# Altium PCB Placa_Sencilla_v2.PcbDoc
Units mm, origin at the board's own origin, x right, y up, seen from the top; angles counter-clockwise.
Board outline 48 x 48 mm, 2 copper layers (Top Layer, Bottom Layer), stack 1.571 mm thick; 56 components, 50 nets, 225 pads, 55 vias.
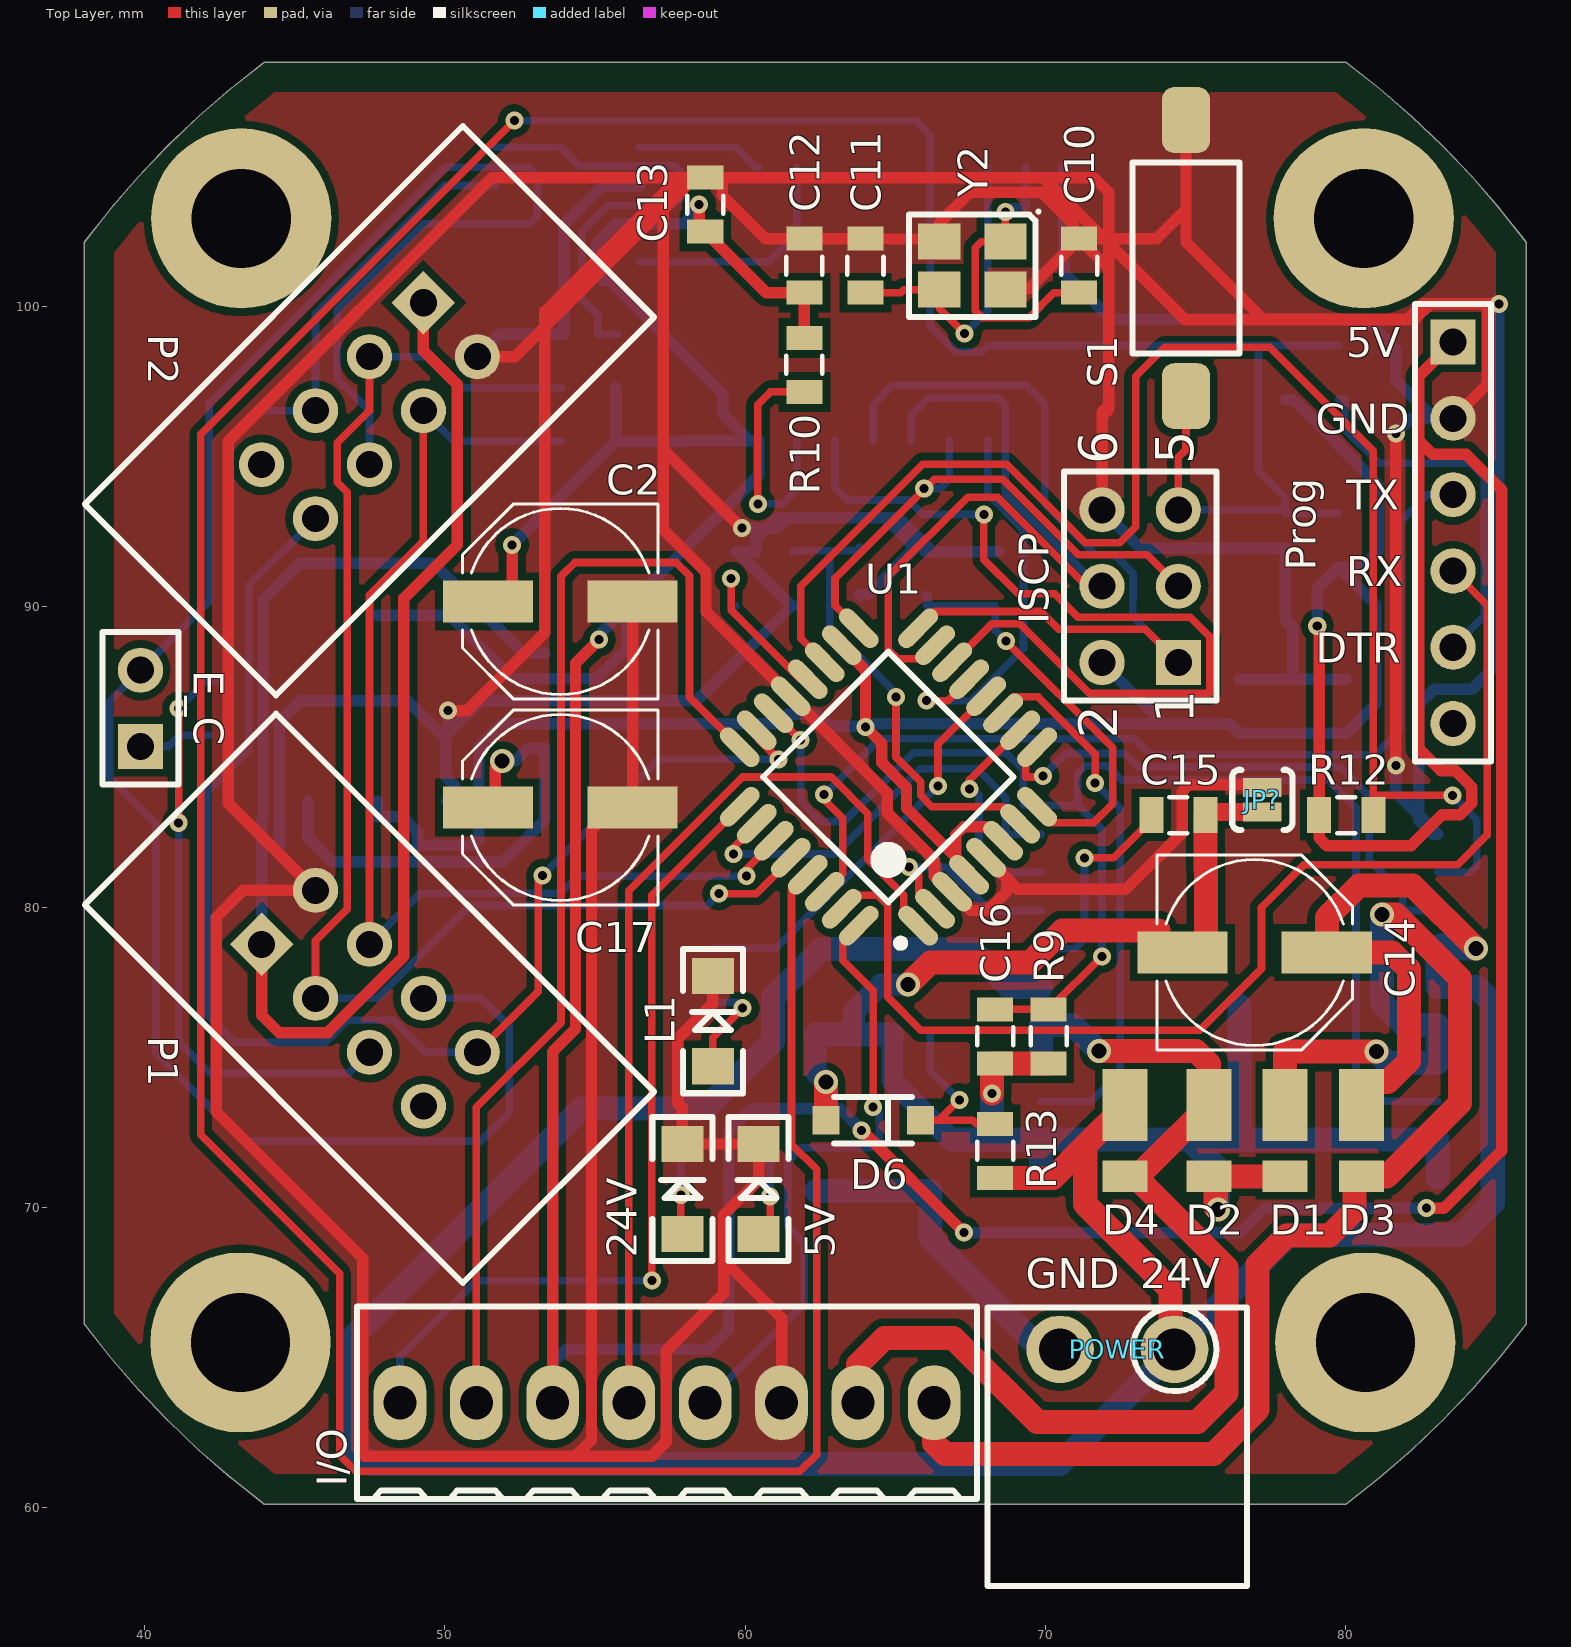
[diagram p0: Top Layer view]
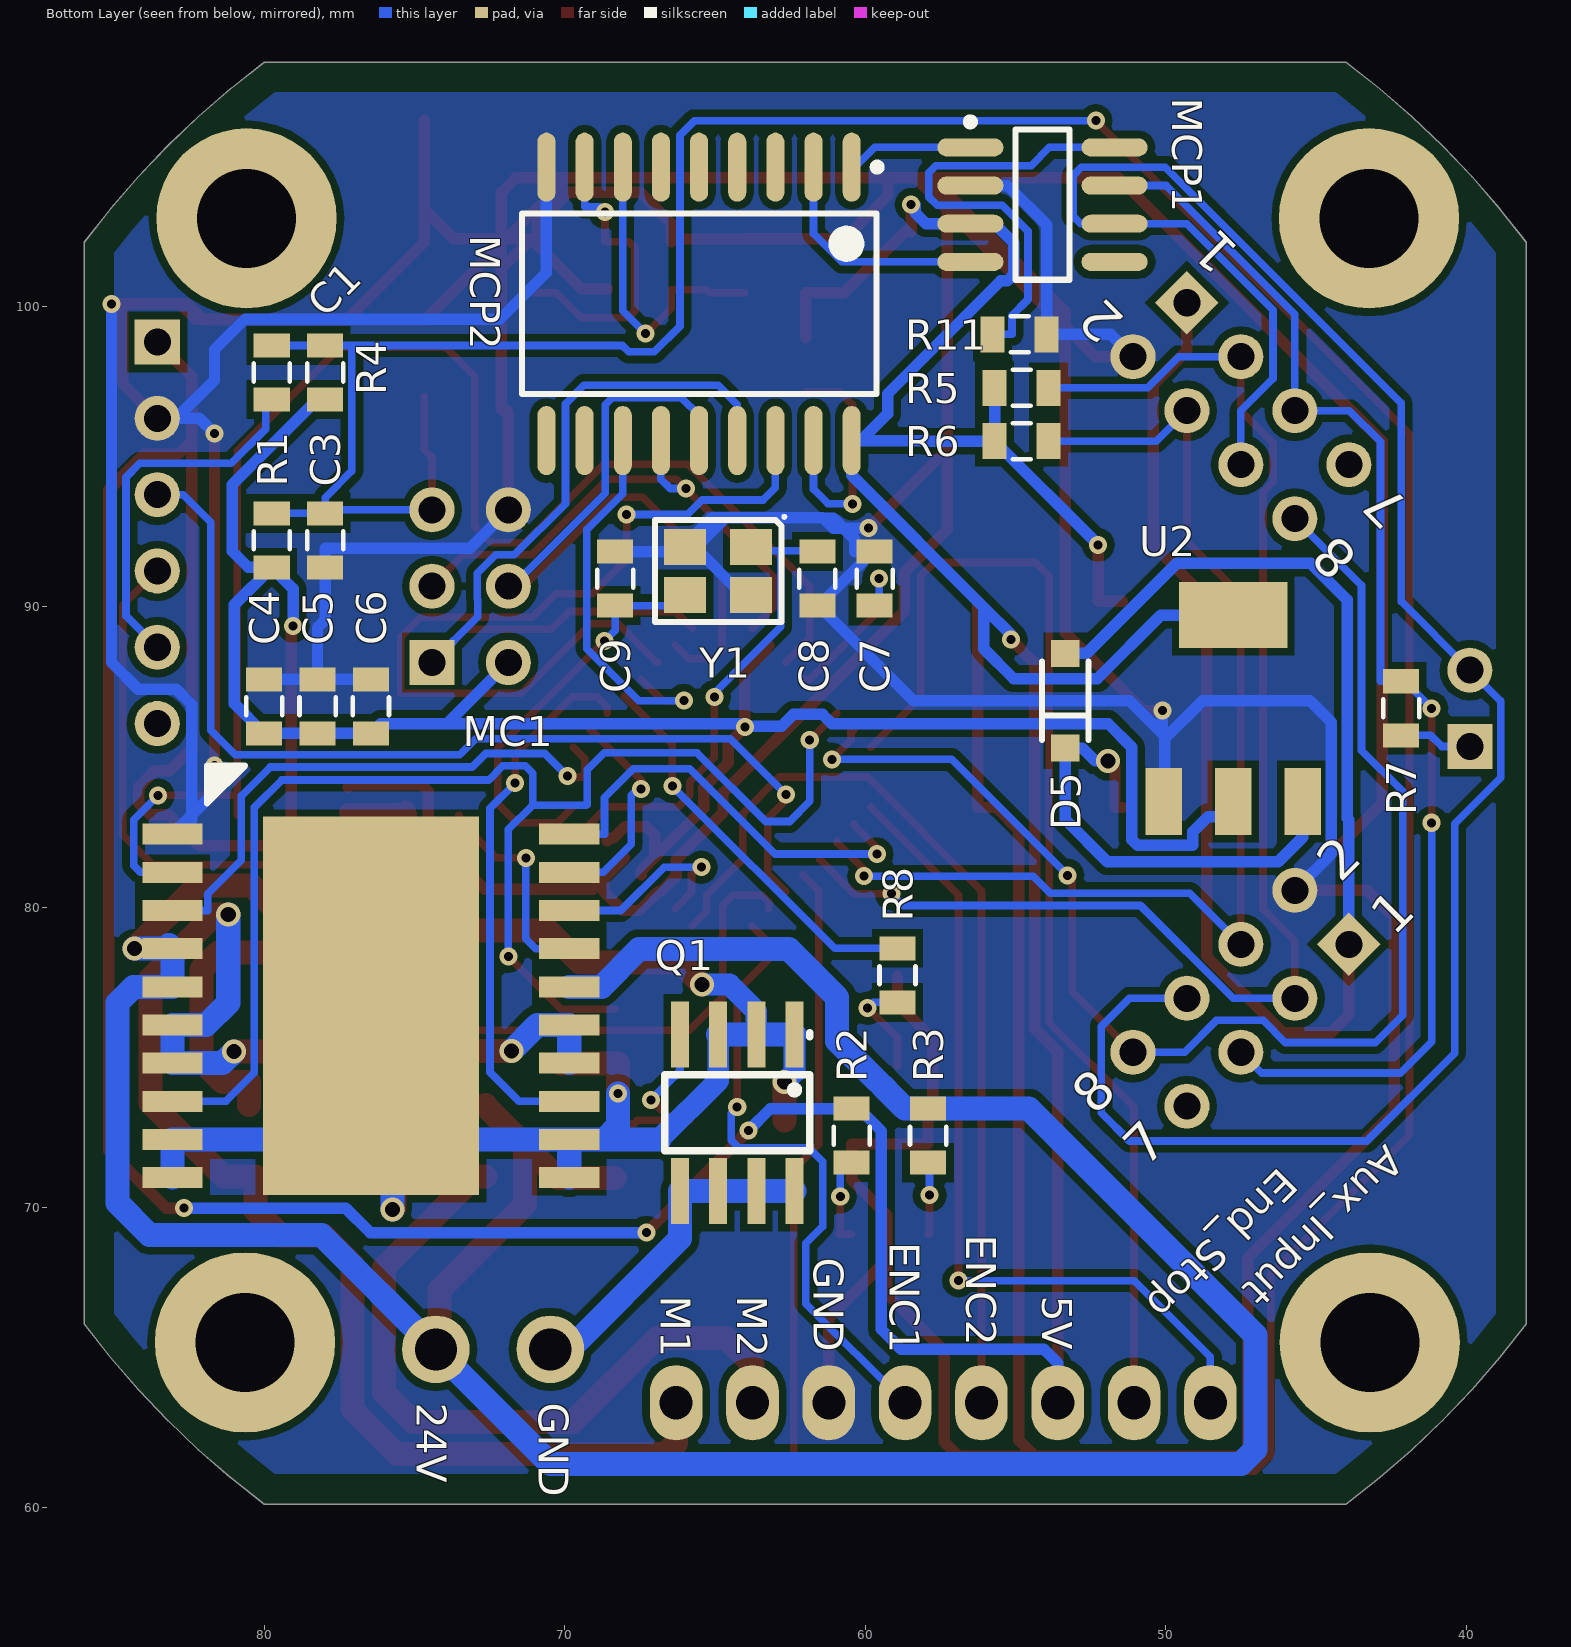
[diagram p1: Bottom Layer view, seen from below]
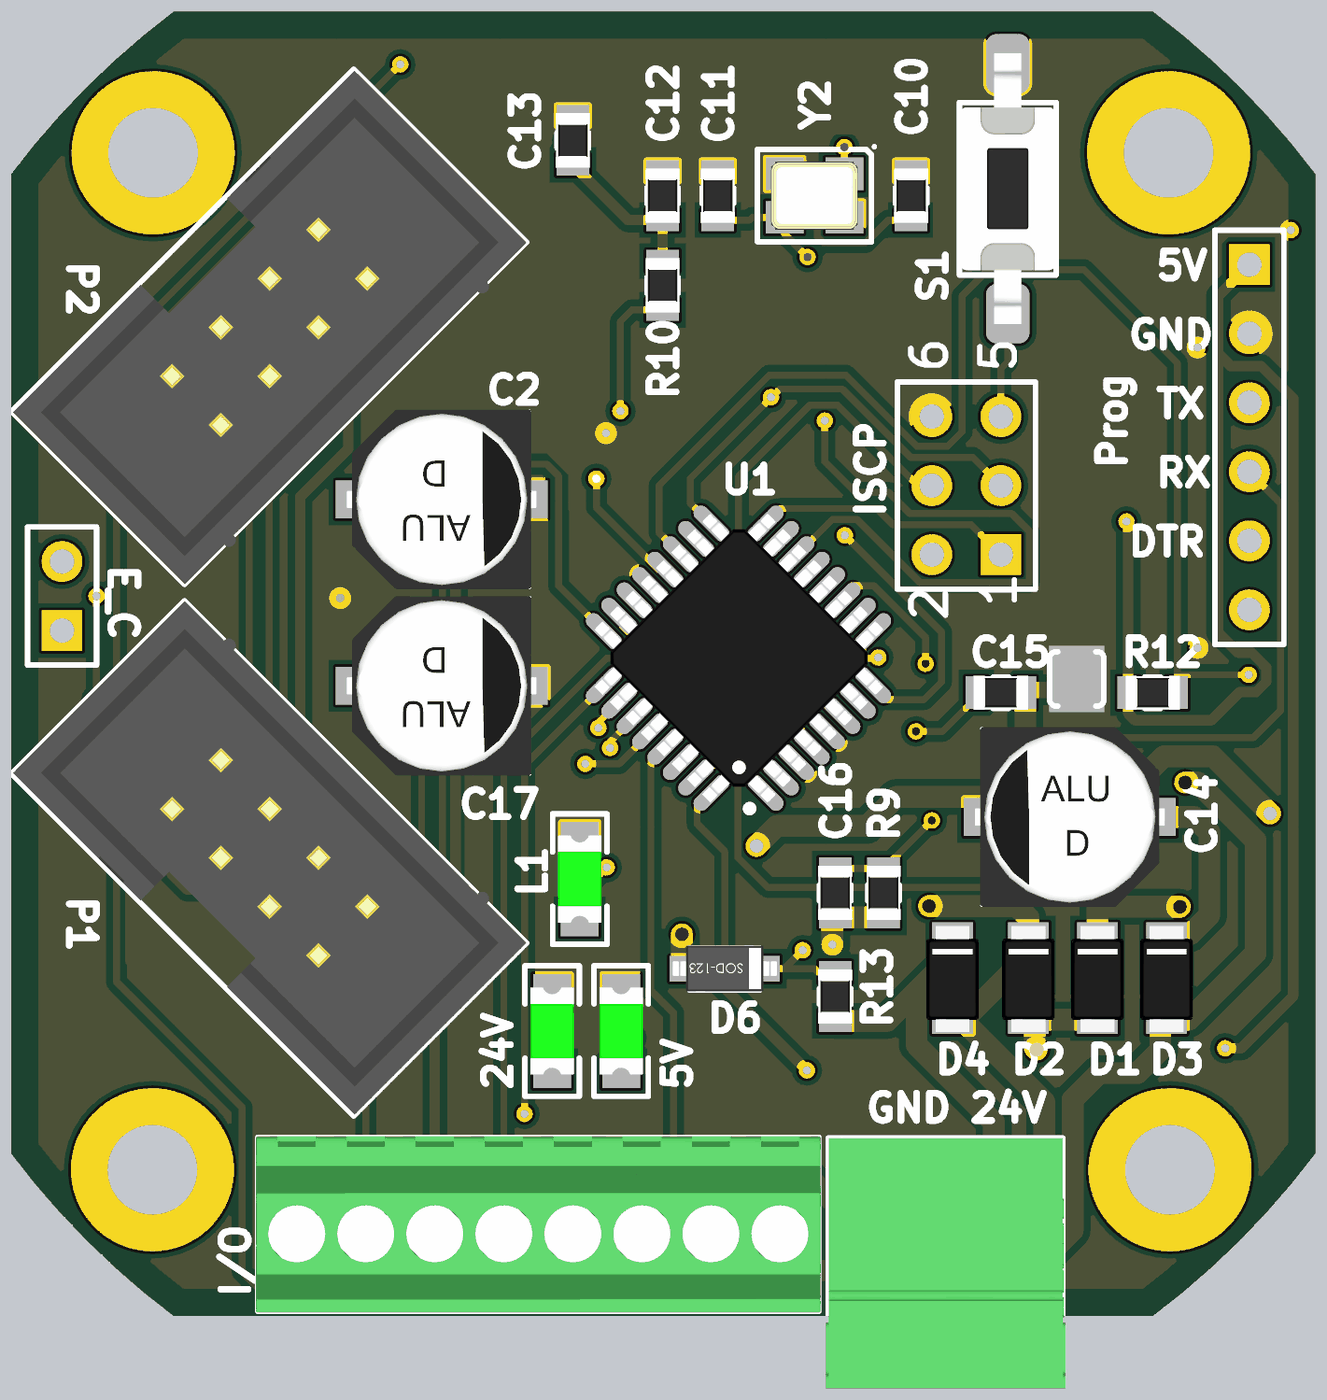
[diagram p2: 3D render of the assembled board from above, using the file's embedded part models]
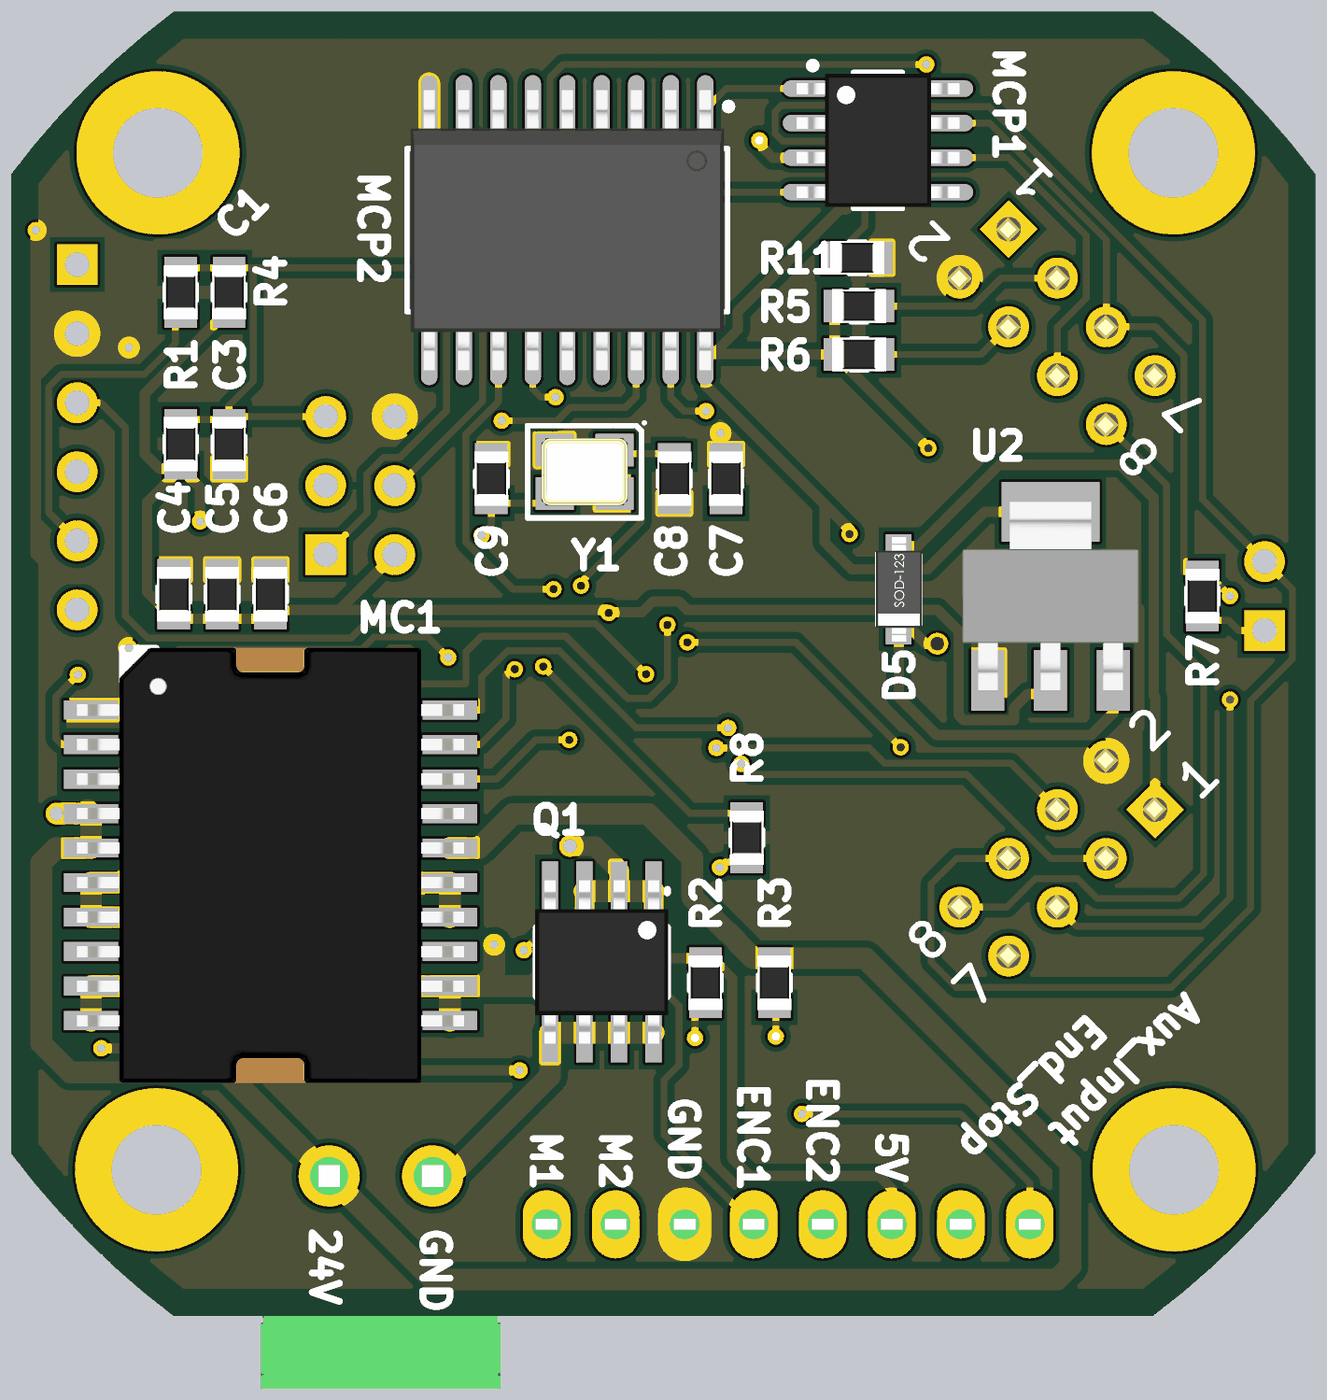
[diagram p3: 3D render of the assembled board from below, using the file's embedded part models]

## Layer stack, top to bottom
Top Solder: solder mask 0.0102, Solder Resist, Dk 3.5
Top Layer: signal copper 0.0356
Dielectric 1: dielectric 1.5, FR-4, Dk 4.8
Bottom Layer: signal copper 0.0356
Bottom Solder: solder mask 0.0102, Solder Resist, Dk 3.5

## Board outline
40.788,62.908 39.809,63.934 38.88,65.004 38.001,66.119 38.001,102.125 38.88,103.239 39.809,104.309 40.788,105.335 41.813,106.313 42.884,107.243 43.998,108.122 80.004,108.122 81.118,107.243 82.189,106.313 83.214,105.335 84.192,104.309 85.122,103.239 86.001,102.125 86.001,66.119 85.122,65.004 84.192,63.934 83.214,62.908 82.189,61.93 81.118,61 80.004,60.122 43.998,60.122 42.884,61 41.813,61.93

## Design rules (kind name [scope] priority, off if disabled: settings)
BoardOutlineClearance [All] p1: gap=1 ignorepadtopadclearanceinfootprint=FALSE
Clearance Clearance_2 [InNamedPolygon('GND TOP PLANE')] p1: gap=0.254 ignorepadtopadclearanceinfootprint=FALSE except(0: Arc-Hole Track-Hole SMDPad-Hole THPad-Hole Via-Hole Fill-Hole Poly-Hole Region-Hole Text-Hole)
Clearance Clearance_1 [InNamedPolygon('GND BOTTOM PLANE')] p2: gap=0.254 ignorepadtopadclearanceinfootprint=FALSE except(0: Arc-Hole Track-Hole SMDPad-Hole THPad-Hole Via-Hole Fill-Hole Poly-Hole Region-Hole Text-Hole)
Clearance Clearance_JUMPER [InNet('GND') vs InNet('PGND')] p3: gap=0.05 ignorepadtopadclearanceinfootprint=FALSE
Clearance Clearance_POWER [InNet('24V') vs InNet('PGND')] p4: gap=0.381 ignorepadtopadclearanceinfootprint=FALSE
Clearance [All] p5: gap=0.152 ignorepadtopadclearanceinfootprint=FALSE
HoleSize [All] p1: absolutevalues=TRUE maxlimit=6.3 minlimit=0.3 maxpercent=80.000 minpercent=20.000
PlaneClearance [All] p1: clearance=5.016
PlaneConnect [All] p1: planeconnectstyle=Relief reliefexpansion=0.508 reliefentries=4 reliefconductorwidth=0.381 reliefairgap=-0.05
PolygonConnect [All] p1: connectstyle=Relief reliefconductorwidth=0.254 reliefentries=4 polygonreliefangle="90 Angle" airgapwidth=-0.05
RoomDefinition Placa_Motor_Esquematico_v2 [InComponentClass('Placa_Motor_Esquematico_v2')] p1: confinementstyle=ConfineOut formatcopy=TRUE lockcomponents=FALSE outline 260.731,135.89 261.112,135.509 261.112,130.048 264.541,130.048 265.176,130.683 265.176,134.874 264.16,135.89 264.287,136.017 264.287,139.446
RoutingVias RoutingVias_24V [InNet('24V')] p1: holewidth=0.5 width=0.8 viastyle="Through Hole" minholewidth=0.3 minwidth=0.6 maxholewidth=1 maxwidth=1.2
RoutingVias RoutingVias_PGND [InNet('PGND')] p2: holewidth=0.5 width=0.8 viastyle="Through Hole" minholewidth=0.3 minwidth=0.6 maxholewidth=1 maxwidth=1.2
RoutingVias RoutingVias_PGNDC [InNet('PGNDC')] p3: holewidth=0.5 width=0.8 viastyle="Through Hole" minholewidth=0.3 minwidth=0.6 maxholewidth=1 maxwidth=1.2
RoutingVias RoutingVias_MOTOR1 [InNet('MOTOR1')] p4: holewidth=0.5 width=0.8 viastyle="Through Hole" minholewidth=0.3 minwidth=0.6 maxholewidth=1 maxwidth=1.2
RoutingVias RoutingVias_MOTOR2 [InNet('MOTOR2')] p5: holewidth=0.5 width=0.8 viastyle="Through Hole" minholewidth=0.3 minwidth=0.6 maxholewidth=1 maxwidth=1.2
RoutingVias RoutingVias_C17_1 [InNet('NetC17_+')] p6: holewidth=0.5 width=0.8 viastyle="Through Hole" minholewidth=0.3 minwidth=0.6 maxholewidth=1 maxwidth=1.2
RoutingVias [All] p7: holewidth=0.3 width=0.6 viastyle="Through Hole" minholewidth=0.3 minwidth=0.6 maxholewidth=1 maxwidth=1.2
SMDNeckDown [All] p1: percent=120.000
SilkToSilkClearance [All] p1 off: silktosilkclearance=0.127
SolderMaskExpansion [All] p1: expansion=0.102
Width Width_Motor1 [InNet('MOTOR1')] p1: maxlimit=0.889 minlimit=0.7 preferedwidth=0.8
Width Width_Motor2 [InNet('MOTOR2')] p2: maxlimit=0.889 minlimit=0.7 preferedwidth=0.8
Width Width_24V [InNet('24V')] p3: maxlimit=0.889 minlimit=0.7 preferedwidth=0.8
Width Width_PGND [InNet('PGND')] p4: maxlimit=0.889 minlimit=0.6 preferedwidth=0.8
Width Width_PGNDC [InNet('PGNDC')] p5: maxlimit=0.889 minlimit=0.6 preferedwidth=0.8
Width Width_GND [InNet('GND')] p6: maxlimit=0.508 minlimit=0.254 preferedwidth=0.381 checkconnectedcopper=TRUE
Width Width_Vin [InNet('Vin')] p7: maxlimit=0.508 minlimit=0.254 preferedwidth=0.381 checkconnectedcopper=TRUE
Width Width_C17_1 [InNet('NetC17_+')] p8: maxlimit=0.508 minlimit=0.254 preferedwidth=0.381 checkconnectedcopper=TRUE
Width Width_5V [InNet('5V')] p9: maxlimit=0.381 minlimit=0.254 preferedwidth=0.381 checkconnectedcopper=TRUE
Width [All] p10: maxlimit=0.508 minlimit=0.254 preferedwidth=0.254
26 further rules are at their usual default settings.

## Components (designator, comment, footprint, x,y, rotation, side; value= is the part's Value field where it differs from the comment)
5V "1206 LED" LED-1206 60.452,70.612 r90 top
24V "1206 LED" LED-1206 57.912,70.612 r90 top
C1 "100n" 0805 79.756,97.79 r270 bottom
C2 "47u" PANASONIC_D 53.848,90.17 r180 top
C3 "22p" 0805 77.978,92.202 r270 bottom
C4 "100n" 0805 80.01,86.679 r90 bottom
C5 "100n" 0805 78.232,86.679 r90 bottom
C6 "100n" 0805 76.454,86.679 r90 bottom
C7 "100n" 0805 59.69,90.932 r90 bottom
C8 "22p" 0805 61.595,90.932 r270 bottom
C9 "22p" 0805 68.326,90.932 r90 bottom
C10 "22p" 0805 71.12,101.346 r90 top
C11 "22p" 0805 64.008,101.346 r90 top
C12 "100n" 0805 61.976,101.346 r90 top
C13 "100n" 0805 58.674,103.378 r90 top
C14 "100u" PANASONIC_D 76.962,78.486 r0 top
C15 "33n" 0805 74.422,83.058 r0 top
C16 "1u" 0805 68.326,75.692 r270 top
C17 "47u" PANASONIC_D 53.848,83.312 r180 top
D1 "SBR3U40P1-7" POWERDI-123 77.978,71.882 r90 top
D2 "SBR3U40P1-7" POWERDI-123 75.438,71.882 r90 top
D3 "SBR3U40P1-7" POWERDI-123 80.518,71.882 r90 top
D4 "SBR3U40P1-7" POWERDI-123 72.644,71.882 r90 top
D5 "SOD123-1A" SOD-123 53.34,86.868 r90 bottom
D6 "13V Zener MM1Z13" SOD-123 64.262,72.898 r180 top
E_C "Header 2" HDR1X2 39.878,85.344 r90 top
I/O "282834-8" "TE 282834-8" 57.404,63.5 r180 top
ISCP "Header 3X2" HDR2X3 74.422,88.138 r90 top
JP? "JUMPER-PAD-2-NC_BY_PASTE" PAD-JUMPER-2-NC_BY_PASTE_YES_SILK 77.216,83.566 r90 top
L1 "1206 LED" LED-1206 58.928,76.2 r90 top
MC1 "MC33887" SOIC127P1420X340-21N 76.454,76.708 r180 bottom
MCP1 "MCP2551T-I/SN" SOIC-SN8_N 54.102,103.378 r180 bottom
MCP2 "MCP2515T-E/SO" SOIC-SO18_N 65.532,100.076 r270 bottom
P1 "IDC2X4" IDC2X4 47.498,76.962 r315 top
P2 "IDC2X4" IDC2X4 47.498,96.52 r225 top
POWER "20020110-D021A01LF" "FCI 06-381-2PIN" 72.39,61.976 r180 top
Prog "Header 6" HDR1X6 83.566,98.806 r270 top
Q1 "IRF7832TRPBF" SO-08 64.262,73.152 r0 bottom
R1 "10K" 0805 79.756,92.202 r270 bottom
R2 "560" 0805 60.452,72.39 r90 bottom
R3 "5.6K" 0805 57.912,72.39 r90 bottom
R4 "10K" 0805 77.978,97.79 r90 bottom
R5 "0" 0805 54.797,97.282 r0 bottom
R6 "0" 0805 54.797,95.504 r0 bottom
R7 "124" 0805 42.164,86.614 r270 bottom
R8 "560" 0805 58.928,77.724 r90 bottom
R9 "200" 0805 70.104,75.692 r90 top
R10 "10K" 0805 61.976,98.044 r90 top
R11 "4.7K" 0805 54.864,99.06 r0 bottom
R12 "47k" 0805 80.01,83.058 r180 top
R13 "20K" 0805 68.326,71.882 r270 top
S1 "FSMSMTR" "TE FSMSMTR" 74.676,101.6 r180 top
U1 "ATmega328P-AU" 32A_N 64.77,84.328 r135 top
U2 "NCP1117" SOT223 47.752,86.614 r180 bottom
Y1 "16MHz" "NDK NX3225SA" 64.897,91.186 r0 bottom
Y2 "16MHz" "NDK NX3225SA" 67.564,101.346 r180 top

## Footprints (in the part's own frame and the unit in brackets; to place one, negate y for a bottom-side part, rotate by r counter-clockwise, add the part's x,y. Pads: shape width x height; smd on the part's side, far side on the other; paste and mask are expansions set on the pad)
32A_N [mm] "Thin QFP, 32-Leads, Body 7x7mm, Pitch 0.8mm, IPC Medium Density"
  oval 1.65x0.55 smd: 1(-4.2,2.8) 2(-4.2,2) 3(-4.2,1.2) 4(-4.2,0.4) 5(-4.2,-0.4) 6(-4.2,-1.2) 7(-4.2,-2) 8(-4.2,-2.8) 17(4.2,-2.8) 18(4.2,-2) 19(4.2,-1.2) 20(4.2,-0.4) 21(4.2,0.4) 22(4.2,1.2) 23(4.2,2) 24(4.2,2.8)
  oval 0.55x1.65 smd: 9(-2.8,-4.2) 10(-2,-4.2) 11(-1.2,-4.2) 12(-0.4,-4.2) 13(0.4,-4.2) 14(1.2,-4.2) 15(2,-4.2) 16(2.8,-4.2) 25(2.8,4.2) 26(2,4.2) 27(1.2,4.2) 28(0.4,4.2) 29(-0.4,4.2) 30(-1.2,4.2) 31(-2,4.2) 32(-2.8,4.2)
  silkscreen extent -4.32,-2.95 2.95,3.75, body extent -4.52,-4.53 4.5,4.5, height 1.15
0805 [mil]
  rect 31.5x47.24 smd: 1(-35.43,0) 2(35.43,0)
  silkscreen extent -12,-24 12,24, body extent -39,-25 39,25, height 20
"FCI 06-381-2PIN" [mm] "FCI Pluggable Terminal Block"
  round 2.25 hole 1.4: 1(-1.905,-3.302) 2(1.905,-3.302)
  silkscreen extent -4.32,-4.7 4.32,4.57, body extent -4.4,-4.7 4.4,4.5, height 7.6
HDR1X2 [mm] "Connector; Header; 2 Position"
  rect 1.5x1.5 hole 0.9: 1(0,0)
  round 1.5 hole 0.9: 2(2.54,0)
  silkscreen extent -1.27,-1.27 3.81,1.27
HDR1X6 [mm] "Connector; Header; 6 Position"
  rect 1.5x1.5 hole 0.9: 1(0,0)
  round 1.5 hole 0.9: 2(2.54,0) 3(5.08,0) 4(7.62,0) 5(10.16,0) 6(12.7,0)
  silkscreen extent -1.27,-1.27 13.97,1.27
HDR2X3 [mm] "Connector; Header; 3x2 Position"
  rect 1.5x1.5 hole 0.9: 1(0,0)
  round 1.5 hole 0.9: 2(0,2.54) 3(2.54,0) 4(2.54,2.54) 5(5.08,0) 6(5.08,2.54)
  silkscreen extent -1.27,-1.27 6.35,3.81
IDC2X4 [mm] "IDC Connector 2x4"
  rect 1.5x1.5 hole 0.9: 1(-3.81,-1.27)
  round 1.5 hole 0.9: 2(-3.81,1.27) 3(-1.27,-1.27) 4(-1.27,1.27) 5(1.27,-1.27) 6(1.27,1.27) 7(3.81,-1.27) 8(3.81,1.27)
  silkscreen extent -8.9,-4.5 8.9,4.5, body extent -8.89,-4.45 8.89,4.76, height 9.01
LED-1206 [mm]
  rect 1.2x1.4 smd: A(-1.5,0) C(1.5,0)
  silkscreen extent -2.4,-1 2.4,1, body extent -1.6,-0.8 1.6,0.8, height 1.11
"NDK NX3225SA" [mm] "Crystal, 4-Leads, Body 2.50x3.20mm, Pitch 2.20mm, IPC Medium Density"
  rect 1.4x1.2 smd: 1(-1.1,-0.8) 2(1.1,-0.8) 3(1.1,0.8) 4(-1.1,0.8)
  silkscreen extent -2.25,-1.85 2.1,1.7, body extent -1.61,-1.26 1.61,1.26, height 0.6
PAD-JUMPER-2-NC_BY_PASTE_YES_SILK [mm]
  rect 0.635x1.27 smd: 1(-0.401,0) 2(0.413,0)
  silkscreen extent -1,-1 1,1
PANASONIC_D [mm]
  rect 3x1.4 smd: +(2.4,0) -(-2.4,0)
  silkscreen extent -3.25,-3.25 3.25,3.25, body extent -3.5,-3.3 3.5,3.3, height 5.4
POWERDI-123 [mm]
  rect 1.05x1.5 smd: A(-0.85,0)
  rect 2.4x1.5 smd: C(1.525,0)
  body extent -1.31,-0.97 2.59,0.96, height 1.01
SO-08 [mm]
  rect 0.6x2.2 smd: 1(-1.905,-2.6) 2(-0.635,-2.6) 3(0.635,-2.6) 4(1.905,-2.6) 5(1.905,2.6) 6(0.635,2.6) 7(-0.635,2.6) 8(-1.905,2.6)
  silkscreen extent -2.41,-2.67 2.41,1.27, body extent -2.45,-3 2.45,3, height 1.75
SOD-123 [mm]
  rect 0.9x0.95 smd: A(1.575,0) C(-1.575,0)
  silkscreen extent -1.3,-0.77 1.3,0.77, body extent -1.93,-0.86 1.92,0.84, height 1.46
SOIC127P1420X340-21N [mm]
  rect 2x0.7 smd: 1(-6.6,5.715) 2(-6.6,4.445) 3(-6.6,3.175) 4(-6.6,1.905) 5(-6.6,0.635) 6(-6.6,-0.635) 7(-6.6,-1.905) 8(-6.6,-3.175) 9(-6.6,-4.445) 10(-6.6,-5.715) 11(6.6,-5.715) 12(6.6,-4.445) 13(6.6,-3.175) 14(6.6,-1.905) 15(6.6,-0.635) 16(6.6,0.635) 17(6.6,1.905) 18(6.6,3.175) 19(6.6,4.445) 20(6.6,5.715)
  rect 7.2x12.6 smd: 21(0,0)
  silkscreen extent -5.46,6.73 -4.19,8, body extent -7.12,-8 7.13,8, height 3.21
SOIC-SN8_N [mm] "SOIC, 8-Leads, Body 4.9x3.8mm, Pitch 1.27mm, IPC Medium Density"
  oval 2.2x0.6 smd: 1(-2.4,1.905) 2(-2.4,0.635) 3(-2.4,-0.635) 4(-2.4,-1.905) 5(2.4,-1.905) 6(2.4,-0.635) 7(2.4,0.635) 8(2.4,1.905)
  silkscreen extent -2.53,-2.5 0.9,2.88, body extent -3,-2.45 3,2.45, height 1.75
SOIC-SO18_N [mm] "SOIC, 18-Leads, Body 11.5x7.5mm, Pitch 1.27mm, IPC Medium Density"
  oval 2.3x0.6 smd: 1(-4.55,5.08) 2(-4.55,3.81) 3(-4.55,2.54) 4(-4.55,1.27) 5(-4.55,0) 6(-4.55,-1.27) 7(-4.55,-2.54) 8(-4.55,-3.81) 9(-4.55,-5.08) 10(4.55,-5.08) 11(4.55,-3.81) 12(4.55,-2.54) 13(4.55,-1.27) 14(4.55,0) 15(4.55,1.27) 16(4.55,2.54) 17(4.55,3.81) 18(4.55,5.08)
  silkscreen extent -4.67,-5.9 3,6.05, body extent -5.15,-5.77 5.15,5.76, height 2.65
SOT223 [mil]
  rect 48x88 smd: 1(-91,-122) 2(0,-122) 3(91,-122)
  rect 141.73x86.61 smd: 4(0,122.01)
  body extent -128,-136 128,136, height 63
"TE 282834-8" [mm]
  oval 1.75x2.5 hole 1.1: 1(-8.89,0) 2(-6.35,0) 3(-3.81,0) 4(-1.27,0) 5(1.27,0) 6(3.81,0) 7(6.35,0) 8(8.89,0)
  silkscreen extent -10.32,-3.2 10.32,3.2, body extent -10.39,-3.25 10.39,3.25, height 10
"TE FSMSMTR" [mm]
  rrect50% 1.6x2.19 smd: 1(0,4.595) 2(0,-4.595)
  silkscreen extent -1.78,-3.18 1.78,3.18, body extent -1.75,-4.98 1.75,4.98, height 4.42

## Part data
5V 24V L1: library part LED1206
C1 C3 C4 C5 C6 C7 C8 C9 C10 C11 C12 C13 C15 C16: library part CAP0805
C2 C14 C17: library part 47UF-50V-20%(ELECT), PROD_ID=CAP-10547
  C14: Size=6.3mm
D1 D2 D3 D4: library part DFLS1100-7
D5: library part DIODESOD123
D6: library part DIODE-ZENER16V, PROD_ID=DIO-12440
E_C: "Header, 2-Pin", LatestRevisionDate=17-Jul-2002, LatestRevisionNote="Re-released for DXP Platform.", Publisher="Altium Limited"
I/O: "TERM BLOCK 8POS SIDE ENT 2.54MM", Colour=Green, Manufacturer="TE Connectivity AMP Connectors", Supplier Part Number 1=A98338-ND, TemperatureRange="-40C ~ 105C", Voltage=150V, ComponentLink1Description=Datasheet, ComponentLink1URL=http://www.te.com/commerce/DocumentDelivery/DDEController?Action=srchrtrv&DocNm=282834&DocType=Customer+Drawing&DocLang=English, ComponentLink2Description="Digi-Key Listing", ComponentLink2URL=http://www.digikey.ca/product-detail/en/282834-8/A98338-ND/1150136, Number Of Levels=1, Orientation="Horizontal with Board", PartId=9295, Part Number=282834-8, Pitch="0.100\" (2.54mm)", Positions Per Level=8, Price=8,41, Supplier 1=Digi-Key
ISCP: "Header, 3-Pin, Dual row", LatestRevisionDate=17-Jul-2002, LatestRevisionNote="Re-released for DXP Platform.", Publisher="Altium Limited"
MC1: "Motor / Motion / Ignition Controllers & Drivers 5.0 A H-BRIDGE", Manufacturer_Name=NXP, Arrow Part Number=MC33887, Datasheet Link=https://www.nxp.com/docs/en/data-sheet/MC33887.pdf, Geometry.Height=3.4mm, Manufacturer_Part_Number=MC33887
MCP1: "High-Speed CAN Transceiver, 8-Pin SOIC, Industrial Temperature, Tape and Reel", Supplier Part Number 1=MCP2551T-I/SNTR-ND, Code_IPC=SOIC127P600-8, Code_JEDEC=MS-012, ComponentLink1Description=Datasheet, ComponentLink1URL=http://ww1.microchip.com/downloads/en/DeviceDoc/21667E.pdf, ComponentLink2Description="Packaging Specification", ComponentLink2URL=http://www.microchip.com/stellent/groups/techpub_sg/documents/packagingspec/en012702.pdf, ComponentLink3Description="Microchip.com Home", ComponentLink3URL=http://www.microchip.com/, DatasheetVersion="revE, Jan-2007", PackageDescription="8-Lead Plastic Small Outline (SN) - Narrow, 3.90mm Body [SOIC]", PackageReference=SOIC-SN8, PackageVersion="revBB, Aug-2009", Published=29-Jan-2009, Publisher="Altium Limited", Supplier 1=Digi-Key, Supplier 2=Farnell, Supplier Part Number 2=1788569
MCP2: "Stand-Alone CAN Controller With SPI Interface, 18-Pin SOIC, Extended Temperature, Tape and Reel", Supplier Part Number 1=MCP2515T-E/SO-ND, Code_JEDEC=MS-013, ComponentLink1Description=Datasheet, ComponentLink1URL=http://ww1.microchip.com/downloads/en/DeviceDoc/21801e.pdf, ComponentLink2Description="Packaging Specification", ComponentLink2URL=http://www.microchip.com/stellent/groups/techpub_sg/documents/packagingspec/en012702.pdf, ComponentLink3Description="Microchip.com Home", ComponentLink3URL=http://www.microchip.com/, DatasheetVersion="revE, Nov-2007", PackageDescription="18-Lead Plastic Small Outline (SO) - Wide 7.50mm Body [SOIC]", PackageReference=SOIC-SO18, PackageVersion="revBB, Aug-2009", Published=29-Jan-2009, Publisher="Altium Limited", Supplier 1=Digi-Key
P1 P2: "Header, 4-Pin, Dual row", LatestRevisionDate=17-Jul-2002, LatestRevisionNote="Re-released for DXP Platform.", Publisher="Altium Limited"
POWER: "TERM BLOCK HDR 2POS R/A 3.81MM", Colour=Green, Manufacturer=FCI, Supplier Part Number 1=609-3819-ND, TemperatureRange="-40C ~ 115C", Voltage=300V, ComponentLink1Description=Datasheet, ComponentLink1URL=http://portal.fciconnect.com/Comergent//fci/drawing/20020110.pdf, ComponentLink2Description="Digi-Key Listing", ComponentLink2URL=http://www.digikey.ca/product-detail/en/20020110-D021A01LF/609-3819-ND/2261255, Number Of Levels=1, Number Of Positions=2, Orientation="90, Right Angle", PartId=7785, Part Number=20020110-D021A01LF, Pitch="0.150\" (3.81mm)", Positions Per Level=2, Price=0,75, Supplier 1=Digi-Key, Type="Through Hole"
Prog: "Header, 6-Pin", LatestRevisionDate=17-Jul-2002, LatestRevisionNote="Re-released for DXP Platform.", Publisher="Altium Limited"
Q1: library part N-MOSFET-SO8S
R1 R2 R3 R4 R5 R6 R7 R8 R9 R10 R11 R12 R13: library part RESISTOR0805-RES
S1: "SWITCH TACTILE SPST-NO 0.05A 24V", Contact Rating @ Voltage="0.05A @ 24VDC", Illumination Type, Colour=-, Manufacturer="TE Connectivity Alcoswitch Switches", Operating Force=180gf, Operating Temperature="-35C ~ 85C", Supplier Part Number 1=450-1758-2-ND, Actuator Orientation="Top Actuated", Actuator Type=Standard, Circuit=SPST-NO, ComponentLink1Description=Datasheet, ComponentLink1URL=http://www.te.com/commerce/DocumentDelivery/DDEController?Action=srchrtrv&DocNm=1437566-3&DocType=Customer+Drawing&DocLang=English, ComponentLink2Description="Digi-Key Listing", ComponentLink2URL=http://www.digikey.com/product-detail/en/FSMSMTR/450-1758-2-ND/529671, Illumination=Non-Illuminated, Illumination Voltage=-, Mechanical Life="20,000 Cycles", PartId=8251, Part Number=FSMSMTR, Price=0,175, Supplier 1=Digi-Key, Switch Function=Off-Mom, Switch Travel=0.25mm
U1: "8-bit AVR Microcontroller, 32KB Flash, 1KB EEPROM, 2KB SRAM, 32-pin TQFP, Industrial Grade (-40°C to 85°C)", Supplier Part Number 1=ATMEGA328P-AU-ND, Code_JEDEC=MS-026-ABA, ComponentLink1Description="Manufacturer Link", ComponentLink1URL=http://www.atmel.com/products/avr/default.asp?, ComponentLink2Description="ATmega48A/48PA/88A/88PA/168A/168PA/328/328P Datasheet", ComponentLink2URL=http://www.atmel.com/dyn/resources/prod_documents/8271.pdf, ComponentLink3Description="ATmega48A/48PA/88A/88PA/168A/168PA/328/328P Summary", ComponentLink3URL=http://www.atmel.com/dyn/resources/prod_documents/8271S.pdf, ComponentLink4Description="Atmel.com Home", ComponentLink4URL=http://www.atmel.com, DatasheetVersion="revA, Jan-2010", PackageDescription="32-Lead, 7x7x1.0 mm Body, 0.8mm Lead Pitch, Thin Profile Plastic Quad Flat Package (TQFP)", PackageReference=32A, PackageVersion="revB, Oct-2001", Published=1-Apr-2010, Publisher="Altium Limited", Supplier 1=Digi-Key, Supplier 2=Farnell, Supplier 3=Mouser, Supplier Part Number 2=1715486, Supplier Part Number 3=556-ATMEGA328P-AU
U2: library part V_REG_LM1117SOT223, PROD_ID=VREG-08170
Y1 Y2: library part NX3225SA-16.000MHZ-STD-CSR-1, "CRYSTAL 16.0000MHZ 8PF SMD", Device Package="4-SMD, No Lead (DFN, LCC)", Frequency Stability=15ppm, Load Capacitance=8pF, Manufacturer=NDK, Operating Mode=Fundamental, Supplier Part Number 1=644-1049-2-ND, ComponentLink1Description=Datasheet, ComponentLink1URL=http://media.digikey.com/pdf/Data%20Sheets/NDK%20PDFs/NX3225SA.pdf, ComponentLink2Description="Digi-Key Listing", ComponentLink2URL=http://www.digikey.com/product-detail/en/NX3225SA-16.000MHZ-STD-CSR-1/644-1049-2-ND/1128831, ESR="80 Ohm", Frequency=16MHz, Frequency Tolerance=15ppm, PartId=8509, Part Number=NX3225SA-16.000MHZ-STD-CSR-1, Price=0,3799, Supplier 1=Digi-Key, Type="MHz Crystal"

## Free pads (board coordinates)
  round 6 hole 3.3: 2(43.205,65.507) 3(43.231,102.921) 3(80.594,102.921) 3(80.645,65.507)

## Via types
v1: diameter 0.6, hole 0.3, Top Layer to Bottom Layer, 47 vias
v2: diameter 0.8, hole 0.5, Top Layer to Bottom Layer, 8 vias

## Nets (pads, with @x,y where several pads share a name; then routed paths per layer and width w, separated by ;. In a path a pad name is that pad's centre, name@x,y a point inside that pad or via, vN(x,y) a via of type N, cw(c..) or ccw(c..) an arc to the next point about the centre after c; other vN are vias at no path point)
5V: C2.+ C4.1 C5.1 C6.1 C12.1 C13.1 I/O.6 ISCP.2 MCP1.3 MCP2.18 Prog.1 R1.2 R2.2 R4.1 R5.2 R6.2 R10.2 R12.2 U1.4 U1.6 U1.18 U2.2 U2.4 | length 247.1
  Top Layer w0.381: C2.+ 52.248,90.17 v1(52.248,92.055) ; I/O.6 53.594,75.184 54.356,75.946 54.356,88.113 v1(55.143,88.9) ; v1(58.471,103.378) 58.471,102.478 C13.1 60.706,100.446 C12.1 R10.2 ; U1.18 U1.18@63.407,88.519 ; U1.18@63.246,88.646 64.008,87.884 v1(64.008,85.992) 64.555,85.446 64.555,84.798 65.372,83.98 65.372,83.294 U1.4@67.005,81.661 ; v1(63.881,72.568) v1(67.285,69.164) ; U1.4 67.457,81.209 U1.4@67.005,81.661 ; U1.6 68.588,82.296 68.487,82.296 68.377,82.296 67.996,82.677 67.285,82.677 67.005,82.398 U1.4@67.005,81.661 ; v1(79.045,89.357) 79.11,89.292 R12.2 79.11,82.296 79.364,82.042 82.169,82.042 83.203,83.076 83.807,83.076 84.183,83.452 84.183,83.985 84.084,84.084 84.09,84.09 83.649,84.531 83.16,84.531 82.423,85.268 82.423,95.529 ; v1(82.677,69.977) 83.261,69.977 85.178,71.894 85.178,93.892 83.998,95.072 82.88,95.072 82.423,95.529 ; Prog.1 82.423,97.663 82.423,95.529
  Bottom Layer w0.381: U2.2 47.752,83.007 48.59,83.007 49.098,82.499 49.098,82.055 50.94,82.055 51.13,82.245 51.13,85.319 51.918,86.106 61.118,86.106 61.423,86.411 62.394,86.411 62.789,86.016 64.008,86.016 v1(64.008,85.992) ; U2.4 50.165,89.713 52.273,87.605 55.067,87.605 56.058,88.595 56.058,89.973 ; v1(52.248,92.055) R6.2 ; I/O.6 53.594,64.821 54.051,65.278 58.801,65.278 59.461,65.938 59.461,72.542 60.209,73.29 R2.2 63.159,73.29 v1(63.881,72.568) ; v1(55.143,88.9) 55.143,89.059 56.058,89.973 ; R5.2 R6.2 ; v1(58.471,103.378) 58.344,103.378 58.344,103.108 57.979,102.743 MCP1.3 55.702,102.743 55.059,102.1 55.059,101.049 55.27,100.838 55.499,100.838 59.258,97.079 59.258,96.415 60.147,95.526 ; v1@64.008,86.106 73.914,86.106 ; v1(67.285,69.164) 76.479,69.164 77.292,69.977 v1(82.677,69.977) ; ISCP.2 73.914,86.106 ; R4.1 78.243,96.89 81.077,94.056 81.077,91.846 80.532,91.302 R1.2 ; v1(79.045,89.357) 79.045,90.591 R1.2 ; R6.2 58.039,95.504 58.061,95.526 60.147,95.526 ; 56.058,89.973 60.452,94.367 MCP2.18 60.147,95.526 ; 73.914,86.106 76.127,86.106 C6.1 C5.1 C4.1 81.001,86.77 81.001,90.057 R1.2
24V: C14.+ D3.C D4.C MC1.4 MC1.5 MC1.16 POWER.1 R3.2 R13.2 | length 115.9
  Top Layer w0.8: R13.2 70.245,70.982 71.323,72.06 ; D4.C 72.644,73.381 71.323,72.06 ; POWER.1 74.168,65.278 74.168,67.263 71.323,70.107 71.323,72.06 ; D3.C 80.518,74.168 81.382,74.168 82.093,74.879 82.093,77.927 81.534,78.486 C14.+ 79.362,79.654 80.429,80.721 82.22,80.721 v2(84.328,78.613)
  Bottom Layer w0.8: MC1.16 68.783,77.343 67.526,78.6 62.547,78.6 60.935,76.987 60.935,75.54 59.637,74.242 59.623,74.242 59.3,73.919 59.3,73.905 58.685,73.29 R3.2 54.559,73.29 47.015,65.746 47.015,61.951 47.498,61.468 70.485,61.468 POWER.1 78.105,69.088 83.82,69.088 84.887,70.155 84.887,76.81 84.353,77.343 MC1.5 MC1.4 83.181,78.74 83.308,78.613 v2(84.328,78.613)
AREF: C7.1 U1.20 | length 5.6
  Top Layer w0.254: v1(59.538,90.932) 59.538,89.883 61.84,87.581 U1.20
  Bottom Layer w0.254: v1(59.538,90.932) 59.538,90.032 C7.1
Aux_Input: I/O.8 U1.25 | length 27.9
  Top Layer w0.254: v1(56.896,67.564) 56.896,80.391 59.82,83.315 U1.25
  Bottom Layer w0.254: I/O.8 48.514,65.024 51.054,67.564 v1(56.896,67.564)
C_CS: MCP2.16 U1.14 | length 28.9
  Top Layer w0.254: U1.14 66.937,88.146 68.219,89.428 69.137,89.428 71.456,87.109 75.463,87.109 75.463,89.002 74.816,89.649 71.082,89.649 70.307,90.424 69.088,90.424 67.945,91.567 v1(67.945,93.066)
  Bottom Layer w0.254: MCP2.16 62.992,93.955 63.398,93.548 65.43,93.548 65.913,93.066 v1(67.945,93.066)
CANH: MCP1.7 P1.5 P2.5 R7.1 | length 42.6
  Top Layer w0.254: v1(41.148,82.804) v1(41.148,86.614)
  Bottom Layer w0.254: v1(41.148,82.804) 41.148,75.514 42.189,74.473 46.805,74.473 P1.5 ; v1(41.148,86.614) 42.164,87.63 R7.1 42.85,87.514 42.85,95.479 43.891,96.52 P2.5 45.702,99.728 49.987,104.013 MCP1.7
CANL: E_C.2 MCP1.6 P1.6 P2.6 | length 72.3
  Bottom Layer w0.254: P2.6 47.498,96.52 46.431,97.587 46.431,99.873 49.301,102.743 MCP1.6 52.832,102.743 53.086,102.997 53.086,104.343 52.807,104.623 50.013,104.623 42.164,96.774 42.164,90.17 E_C.2 38.849,86.855 38.849,84.309 40.386,82.772 40.386,75.133 43.307,72.212 51.206,72.212 52.146,73.152 52.146,76.022 51.206,76.962 P1.6
CTAL1: C10.1 MCP2.8 Y2.1 | length 10.1
  Top Layer w0.254: v1(68.664,103.132) Y2.1 67.869,102.146 67.666,101.943 67.666,99.847 67.894,99.619 69.455,99.619 70.282,100.446 C10.1
  Bottom Layer w0.254: v1(68.664,103.132) 68.834,103.302 69.342,103.302 MCP2.8
CTAL2: C11.1 MCP2.7 Y2.3 | length 10.2
  Top Layer w0.254: C11.1 65.176,100.446 65.276,100.546 Y2.3 66.464,99.931 v1(67.31,99.085)
  Bottom Layer w0.254: v1(67.31,99.085) 68.072,99.847 MCP2.7
D1: MC1.18 U1.2 | length 6.8
  Top Layer w0.254: v1(65.459,81.324) 65.539,81.324 65.786,81.077 65.786,80.484 U1.2
  Bottom Layer w0.254: v1(65.459,81.324) 66.696,81.324 68.137,79.883 MC1.18
D2: MC1.13 U1.11 | length 18.2
  Top Layer w0.254: U1.11 68.588,86.648 68.936,86.995 69.748,86.995 71.653,85.09 v1(71.653,84.125)
  Bottom Layer w0.254: MC1.13 71.526,73.533 72.492,74.498 72.492,83.287 v1(71.653,84.125)
DRIVER1: MC1.3 U1.9 | length 18.9
  Top Layer w0.254: U1.9 69.342,84.94 69.342,84.328 69.886,84.328 v1(69.912,84.353)
  Bottom Layer w0.254: v1(69.912,84.353) 70.668,85.11 72.638,85.11 73.09,84.658 79.807,84.658 80.772,83.693 80.772,81.559 81.89,80.442 81.89,79.883 MC1.3
DRIVER2: MC1.19 U1.10 | length 7.2
  Top Layer w0.254: v1(67.462,83.922) 67.462,84.226 69.12,85.884 U1.10
  Bottom Layer w0.254: v1(67.462,83.922) 67.584,83.922 67.787,83.718 67.787,82.093 68.727,81.153 MC1.19
ENABLE: MC1.20 U1.26 | length 14.4
  Top Layer w0.254: v1(59.614,81.763) 59.614,81.966 60.386,82.738 U1.26
  Bottom Layer w0.254: v1(59.614,81.763) 62.997,81.763 65.837,84.602 67.722,84.602 68.682,83.642 68.682,82.423 MC1.20
ENC1: I/O.4 U1.32 | length 20.8
  Top Layer w0.254: U1.32 63.246,78.844 63.246,78.232 64.262,77.216 v1(64.262,73.336)
  Bottom Layer w0.254: I/O.4 61.976,66.802 61.976,68.809 61.417,69.367 61.417,71.526 61.874,71.984 64.206,71.984 64.465,72.243 64.465,73.133 v1(64.262,73.336)
ENC2: I/O.5 U1.1 | length 31.5
  Top Layer w0.254: I/O.5 56.134,80.543 59.919,84.328 62.861,84.328 64.084,83.105 64.084,81.585 65.278,80.392 65.278,79.86 U1.1
End_Stop: I/O.7 U1.24 | length 39.7
  Top Layer w0.254: I/O.7 51.054,73.33 53.873,76.149 53.873,91.008 54.331,91.465 57.709,91.465 58.151,91.023 58.151,86.987 U1.24
FB: C16.1 MC1.8 R9.2 U1.22 | length 47.8
  Top Layer w0.254: U1.22 v1(61.849,85.552) ; C16.1 R9.2 70.115,76.592 v1(71.882,78.359)
  Bottom Layer w0.254: v1(61.849,85.552) 61.849,83.515 62.518,82.846 63.308,82.846 65.602,85.14 68.682,85.14 69.26,84.561 69.26,83.414 69.286,83.388 71.074,83.388 ; v1(71.882,78.359) 71.882,82.581 71.074,83.388 ; MC1.8 81.28,73.533 80.333,74.48 80.333,83.312 79.419,84.226 72.537,84.226 72.06,84.704 71.323,84.704 71.069,84.45 71.074,83.388
FS: MC1.2 R12.1 U1.19 | length 50.6
  Top Layer w0.254: U1.19 61.849,88.946 61.849,90.678 65.913,94.742 68.707,94.742 71.323,92.126 72.466,92.126 73,92.659 73,97.663 73.965,98.628 77.47,98.628 80.91,95.188 80.91,83.718 ; R12.1 80.91,83.718 ; v1(83.541,83.718) 80.91,83.718
  Bottom Layer w0.254: MC1.2 84.125,81.153 84.353,81.382 84.353,82.906 v1(83.541,83.718)
GND: 5V.C 24V.C C2.- C3.2 C4.2 C5.2 C6.2 C7.2 C8.2 C9.2 C10.2 C11.2 C12.2 C13.2 C17.- I/O.3 ISCP.6 JP?.2 L1.C MC1.1 MCP1.2 MCP2.9 P1.2 P2.2 Prog.2 R11.1 S1.2 U1.3 U1.5 U1.21 U2.1 Y1.2 Y1.4 Y2.2 Y2.4 | length 434.8
  Top Layer w0.381: v1(50.114,86.538) 50.749,86.538 53.34,89.129 53.34,99.822 57.785,104.267 69.926,104.267 ; P2.2 52.342,98.316 57.277,103.251 ; C2.- 56.261,90.17 56.261,83.312 C17.- 55.626,83.312 54.889,82.575 54.889,62.255 54.356,61.722 ; 57.277,95.225 v1(59.893,92.608) ; 57.277,103.226 C13.2@58.318,104.267 ; L1.C 58.928,76.784 57.76,75.616 57.76,73.482 57.912,73.33 24V.C 5V.C 60.452,70.917 59.284,69.748 59.284,68.25 ; C13.2@59.244,104.267 69.926,104.267 ; I/O.3 61.214,66.319 59.284,68.25 ; U1.5 U1.5@68.206,81.458 ; Y2.4 68.58,100.584 69.458,100.584 C10.2 ; ISCP.6 71.882,96.342 ; S1.2 74.676,103.226 ; JP?.2 77.121,84.074 74.778,84.074 74.549,83.845 74.549,82.474 72.662,80.587 69.077,80.587 68.707,80.957 ; v1(81.661,84.709) v1(81.661,95.758) ; Prog.2 84.709,97.409 84.709,99.949 84.582,100.076 ; v1(85.09,100.076) 84.582,100.076 ; 54.356,61.722 56.896,61.722 57.379,62.205 57.379,65.227 59.284,67.132 59.284,68.25 ; 54.356,61.722 47.346,61.722 47.269,61.798 47.269,68.315 42.393,73.192 42.393,79.654 43.292,80.554 P1.2 42.799,83.457 42.799,95.504 51.573,104.278 C13.2@58.304,104.278 ; 57.277,103.251 57.277,92.561 58.699,91.139 58.699,89.833 U1.21 64.736,83.796 64.736,83.135 66.294,81.578 66.294,81.026 66.802,80.518 U1.3 67.518,79.883 68.072,79.883 68.707,80.518 68.707,80.957 ; 57.277,103.251 C13.2@58.304,104.278 ; C13.2@58.304,104.278 C13.2 59.244,104.278 59.244,103.683 60.681,102.246 C12.2 C11.2 64.019,102.235 66.375,102.235 Y2.2 66.464,102.761 67.488,103.784 69.875,103.784 70.917,102.743 70.917,102.246 C10.2 ; U1.5@68.206,81.458 U1.5@68.504,81.16 ; U1.5@68.206,81.458 68.301,81.458 68.504,81.255 U1.5@68.504,81.16 ; U1.5@68.504,81.16 68.707,80.957 ; 69.926,104.267 71.628,104.267 72.111,103.784 72.111,101.255 ; 69.926,104.267 74.651,99.543 82.029,99.543 82.563,100.076 82.804,100.076 ; C10.2 72.111,101.255 ; C10.2 73.696,102.246 74.676,103.226 ; 71.882,96.342 72.111,96.571 72.111,101.255 ; 71.882,96.342 71.882,96.469 72.111,96.698 72.111,101.255 ; 74.676,103.226 74.676,102.133 77.241,99.568 82.296,99.568 82.804,100.076 ; 82.804,100.076 84.582,100.076
  Bottom Layer w0.381: P1.2 44.488,81.768 44.488,86.157 45.2,86.868 48.768,86.868 49.987,85.649 50.038,85.7 50.038,84.328 50.336,84.03 50.336,83.743 U2.1 ; v1(50.114,86.538) 50.114,85.776 51.206,86.868 58.395,86.868 C8.2@61.559,90.032 ; P2.2 51.834,99.06 R11.1 53.964,102.707 55.27,104.013 MCP1.2 ; C7.2 C7.2@59.741,91.832 ; v1(59.893,92.608) 61.062,92.608 61.417,92.964 65.1,92.964 66.232,91.833 68.453,91.833 C9.2 66.178,91.832 66.167,91.821 65.997,91.821 Y1.2 ; C8.2 C8.2@61.559,90.032 ; Y1.4 64.084,90.386 65.653,91.954 65.612,91.995 64.66,92.947 61.058,92.947 60.35,92.239 60.35,91.832 C7.2@59.741,91.832 ; MCP2.9 70.612,101.117 72.161,99.568 80.645,99.568 81.661,98.552 81.661,97.536 Prog.2@82.931,96.266 ; ISCP.6 73.152,91.948 77.978,91.948 C3.2 77.978,89.56 78.232,89.306 C5.2 ; C6.2 C5.2 ; C4.2 C5.2 ; v1(81.661,84.709) 81.661,83.82 MC1.1@83.058,82.423 ; v1(81.661,95.758) 82.169,96.266 Prog.2@82.931,96.266 ; MC1.1 82.88,82.423 82.423,82.88 82.423,86.741 82.931,87.249 84.201,87.249 85.09,88.138 v1(85.09,100.076) ; Prog.2 Prog.2@82.931,96.266 ; C7.2@59.741,91.832 61.541,90.032 C8.2@61.559,90.032
INT: MCP2.12 U1.13 | length 13.1
  Top Layer w0.254: v1(66.04,86.868) 66.744,86.868 U1.13
  Bottom Layer w0.254: v1(66.04,86.868) 67.533,86.868 69.266,88.6 69.266,92.564 68.072,93.757 MCP2.12
LED1: R8.2 U1.12 | length 13.4
  Top Layer w0.254: v1(66.421,84.023) 66.421,85.413 U1.12
  Bottom Layer w0.254: R8.2 61.022,78.624 v1(66.421,84.023)
MISO: ISCP.1 MCP2.15 U1.16 | length 27.8
  Top Layer w0.254: U1.16 66.316,89.834 69.856,89.834 70.447,89.243 73.317,89.243 ISCP.1
  Bottom Layer w0.254: MCP2.15 64.262,96.723 64.9,97.361 69.365,97.361 69.977,96.749 69.977,93.421 71.679,91.719 72.296,91.719 72.911,91.104 72.911,90.252 72.898,90.239 72.898,89.662 ISCP.1
MOSI: ISCP.4 MCP2.14 U1.15 | length 25.5
  Top Layer w0.254: U1.15 65.879,88.265 65.075,88.265 64.77,88.57 64.77,91.008 67.406,93.645 68.407,93.645 71.374,90.678 ISCP.4
  Bottom Layer w0.254: MCP2.14 65.532,96.368 66.119,96.955 68.419,96.955 68.656,96.718 68.656,93.777 71.755,90.678 ISCP.4
MOTOR1: D1.C D3.A I/O.1 MC1.6 MC1.7 | length 48.3
  Top Layer w0.8: I/O.1 66.294,62.154 66.65,61.798 75.59,61.798 77.064,63.271 77.064,68.097 78.029,69.063 79.451,69.063 80.289,69.901 80.289,71.032 D3.A 81.356,71.032 83.795,73.471 83.795,77.622 81.661,79.756 v2(81.204,79.756) ; D1.C 77.978,75.184 v2(81.012,75.184)
  Bottom Layer w0.8: v2(81.012,75.184) 81.393,74.803 MC1.7 MC1.6 81.94,76.073 81.204,76.81 v2(81.204,79.756)
MOTOR2: D2.C D4.A I/O.2 MC1.14 MC1.15 | length 36.5
  Top Layer w0.8: I/O.2 63.754,64.77 64.643,65.659 66.929,65.659 69.723,62.865 75.057,62.865 76.022,63.83 76.022,67.996 D4.A@72.986,71.032 ; v2(71.78,75.209) 75.006,75.209 75.438,74.778 D2.C ; D4.A D4.A@72.986,71.032 ; D2.C 73.203,71.171 73.203,71.032 D4.A@72.986,71.032
  Bottom Layer w0.8: MC1.14 MC1.15 70.917,76.073 v2(71.78,75.209)
Net5V_A: 5V.A R2.1 | length 3.3
  Top Layer w0.254: 5V.A 60.884,69.112 60.833,69.163 v1(60.833,70.358)
  Bottom Layer w0.254: R2.1 60.884,71.49 60.833,71.439 v1(60.833,70.358)
Net24V_A: 24V.A R3.1 | length 2.5
  Top Layer w0.254: v1(57.861,70.409) 57.861,69.112 24V.A
  Bottom Layer w0.254: v1(57.861,70.409) 57.861,71.49 R3.1
NetC1_2: C1.2 Prog.5 | length 12.6
  Bottom Layer w0.254: C1.2 79.959,96.89 79.959,95.91 81.102,94.767 84.15,94.767 84.607,94.31 84.607,89.687 Prog.5
NetC15_1: C15.1 MC1.17 | length 7.2
  Top Layer w0.254: v1(71.298,81.636) 72.277,81.636 73.522,82.88 C15.1
  Bottom Layer w0.254: MC1.17 70.968,78.613 71.298,78.943 v1(71.298,81.636)
NetC17_+: C17.+ D5.C U2.3 | length 15.9
  Top Layer w0.381: C17.+ 51.689,83.312 51.689,84.633 v2(51.918,84.861)
  Bottom Layer w0.381: U2.3 45.441,82.321 46.253,81.509 51.943,81.509 53.34,82.906 D5.C 52.781,85.293 52.349,84.861 v2(51.918,84.861)
NetD6_C: D6.C Q1.4 R13.1 | length 6.1
  Top Layer w0.254: D6.C 66.446,72.898 ; v1(67.132,73.584) 66.446,72.898 ; R13.1 67.696,72.782 67.58,72.898 66.446,72.898
  Bottom Layer w0.254: Q1.4 66.167,74.549 v1(67.132,73.584)
NetE_C_1: E_C.1 R7.2 | length 2.4
  Bottom Layer w0.254: E_C.1 40.818,85.344 41.188,85.714 R7.2
NetL1_A: L1.A R8.1 | length 3.4
  Top Layer w0.254: L1.A 58.928,75.641 v1(59.919,76.632)
  Bottom Layer w0.254: R8.1 59.726,76.824 v1(59.919,76.632)
NetMCP1_1: MCP1.1 MCP2.1 | length 4.2
  Bottom Layer w0.254: MCP1.1 59.69,105.283 60.347,104.626 MCP2.1
NetMCP1_4: MCP1.4 MCP2.2 | length 7.8
  Bottom Layer w0.254: MCP1.4 60.782,101.473 61.722,102.413 MCP2.2
NetMCP1_8: MCP1.8 R11.2 | length 15.4
  Bottom Layer w0.254: MCP1.8 53.873,105.283 54.483,104.673 57.658,104.673 57.887,104.445 57.887,103.632 57.607,103.353 55.448,103.353 54.585,102.489 54.585,100.22 55.118,99.686 55.118,99.06 R11.2
NetMCP2_17: MCP2.17 R10.1 | length 8.1
  Top Layer w0.254: v1(60.427,93.421) 60.427,96.723 60.847,97.144 R10.1
  Bottom Layer w0.254: v1(60.427,93.421) 61.239,93.421 61.722,93.904 MCP2.17
PGND: C14.- C15.2 C16.2 D1.A D2.A D6.A JP?.1 MC1.9 MC1.10 MC1.11 MC1.12 MC1.21 Q1.1 Q1.2 Q1.3 R9.1 | length 65
  Top Layer w0.6: C15.2@75.311,83.185 75.331,83.165 JP?.1
  Top Layer w0.72: C15.2@75.311,83.185 75.311,83.058 C15.2
  Top Layer w0.8: D6.A v2(62.687,74.168) ; v2(65.43,77.419) 66.167,78.156 69.494,78.156 70.561,79.223 73.762,79.223 73.762,78.486 C14.- 75.336,78.486 75.336,81.255 75.322,81.269 C15.2 ; v1(68.224,73.787) 68.224,74.792 C16.2 R9.1 ; D2.A D2.A@75.667,71.032 ; v2(75.743,69.926) 75.667,70.002 D2.A@75.667,71.032 ; D1.A D2.A@75.667,71.032
  Bottom Layer w0.72: Q1.1 62.357,74.498 v2(62.687,74.168) ; Q1.2 63.627,76.53 64.516,77.419 v2(65.43,77.419) ; Q1.3 64.897,74.219 66.853,72.263
  Bottom Layer w0.8: Q1.1 Q1.2 Q1.3 ; 66.853,72.263 68.682,72.263 ; v1(68.224,73.787) 68.224,72.72 68.682,72.263 ; MC1.11 MC1.12 ; v2(75.743,69.926) 75.743,71.298 MC1.21@74.778,72.263 ; MC1.21 MC1.21@76.454,72.263 ; MC1.10 MC1.9 MC1.21@76.454,72.263 ; 68.682,72.263 MC1.12 ; MC1.12 MC1.21@74.778,72.263 ; MC1.21@74.778,72.263 MC1.21@76.454,72.263
PGNDC: POWER.2 Q1.5 Q1.6 Q1.7 Q1.8 | length 11.2
  Bottom Layer w0.8: Q1.8 Q1.7 Q1.6 Q1.5 66.167,68.961 69.85,65.278 POWER.2
RESET: C1.1 C3.1 ISCP.5 R1.1 R4.2 S1.1 U1.29 | length 136.5
  Top Layer w0.254: v1(52.324,106.172) 41.885,95.733 41.885,72.418 46.507,67.795 46.507,61.75 47.043,61.214 61.824,61.214 62.382,61.773 62.382,71.272 61.544,72.111 61.544,80.537 U1.29 ; ISCP.5 74.422,94.971 74.676,95.225 S1.1
  Bottom Layer w0.254: v1(52.324,106.172) 65.684,106.172 66.167,105.689 66.167,99.329 67.021,98.476 67.879,98.476 68.093,98.69 77.089,98.69 ; ISCP.5 77.862,93.218 C3.1 ; R1.1 C3.1 ; C1.1 R4.2 77.089,98.69 ; 77.089,98.69 77.089,94.513 77.978,93.624 C3.1
RXP: Prog.4 U1.31 | length 38.6
  Top Layer w0.254: U1.31 63.214,80.156 63.449,80.391 64.414,80.391 64.745,80.061 64.745,77.005 65.854,75.895 75.133,75.895 77.191,77.953 77.191,79.991 78.604,81.405 83.717,81.405 84.709,82.398 84.709,90.043 Prog.4
SCK: ISCP.3 MCP2.13 U1.17 | length 18.5
  Top Layer w0.254: U1.17 63.754,89.281 62.992,90.043 62.992,90.932 66.294,94.234 68.58,94.234 71.095,91.719 73.381,91.719 ISCP.3
  Bottom Layer w0.254: v1(65.964,93.929) 66.497,93.929 66.802,94.234 MCP2.13
SCL: P1.3 P2.3 R5.1 U1.28 | length 47
  Top Layer w0.254: P1.3 45.702,78.874 46.761,79.934 46.761,93.802 46.431,94.132 46.431,95.453 47.498,96.52 P2.3 ; v1(59.131,80.442) 60.376,80.442 61.517,81.583 U1.28
  Bottom Layer w0.254: P1.3 47.752,76.962 50.84,80.05 58.74,80.05 v1(59.131,80.442) ; P2.3 49.563,98.316 50.597,97.282 R5.1
SDA: P1.4 P2.4 R6.1 U1.27 | length 38.6
  Top Layer w0.254: P1.4 47.498,90.373 49.294,92.169 P2.4 ; v1(60.046,81.026) 60.046,81.255 60.952,82.161 U1.27
  Bottom Layer w0.254: P1.4 49.196,80.456 53.847,80.456 54.417,81.026 v1(60.046,81.026) ; P2.4 50.31,95.504 R6.1
SOS: P1.8 P2.8 U1.23 | length 45.8
  Top Layer w0.254: P1.8 53.111,77.187 53.111,81.051 v1(53.264,81.051) ; U1.23 60.477,85.884 60.477,85.547 v1(61.112,84.912)
  Bottom Layer w0.254: P2.8 43.486,90.712 43.486,85.218 42.113,83.845 42.113,76.403 43.028,75.489 46.025,75.489 46.761,76.225 48.311,76.225 49.37,75.166 P1.8 ; v1(53.264,81.051) 57.125,84.912 v1(61.112,84.912)
TXP: Prog.3 U1.30 | length 33.3
  Top Layer w0.254: v1(62.632,83.739) 62.632,83.566 63.246,82.952 63.246,81.107 U1.30
  Bottom Layer w0.254: v1(62.632,83.739) 64.491,85.598 72.962,85.598 73.496,85.065 80.975,85.065 81.788,85.877 81.788,92.812 82.702,93.726 Prog.3
Vin: D5.A P1.1 P2.1 | length 54
  Top Layer w0.381: P1.1 43.906,76.403 44.49,75.819 46.104,75.819 48.641,78.356 48.641,90.272 50.419,92.05 50.419,97.393 49.294,98.518 P2.1
  Bottom Layer w0.381: P1.1 43.906,82.907 43.955,82.956 43.955,90.221 45.174,91.439 49.632,91.439 52.629,88.443 D5.A
XTAL1: C8.1 U1.7 Y1.1 | length 15.4
  Top Layer w0.254: v1(65.024,86.995) 65.024,84.992 65.842,84.174 65.842,83.718 66.218,83.343 68.584,83.343 U1.7
  Bottom Layer w0.254: C8.1@61.595,91.821 61.633,91.859 62.814,91.859 ; Y1.1 63.797,91.859 62.814,91.859 ; v1(65.024,86.995) 65.024,87.122 62.814,89.332 62.814,91.859
XTAL2: C9.1 U1.8 Y1.3 | length 14
  Top Layer w0.254: v1(68.682,88.849) 72.238,85.293 72.238,83.444 71.597,82.804 70.254,82.804 U1.8
  Bottom Layer w0.254: Y1.3 66.091,90.386 66.091,90.043 66.04,90.043 66.051,90.032 C9.1 68.326,89.205 v1(68.682,88.849)
pads on no net: MCP1.5 MCP2.3 MCP2.4 MCP2.5 MCP2.6 MCP2.10 MCP2.11 P1.7 P2.7 Prog.6

## Polygon pours and split planes (outlines as drawn)
GND on Top Layer "GND TOP PLANE" (solid, pour order 0): 33.782,111.379 34.925,110.236 89.535,110.236 89.535,55.118 88.519,54.102 87.249,55.372 32.131,55.372
GND on Bottom Layer "GND BOTTOM PLANE" (solid, pour order 4): 33.02,111.125 92.329,111.125 94.234,109.22 93.726,108.712 93.726,54.61 31.242,54.61 30.48,55.372

## Silkscreen, mask and mechanical layers (free items; w line width, h text height)
Top Overlay:
  text "5V" at 80.01,98.298 h1
  text "GND" at 78.994,95.758 h1
  text "TX" at 80.01,93.218 h1
  text "RX" at 80.01,90.678 h1
  text "DTR" at 78.994,88.138 h1
  text "GND" at 69.342,67.31 h1
  text "24V" at 73.152,67.31 h1
Bottom Overlay:
  text "Aux_Input" at 42.672,72.136 h1 r135
  text "End_Stop" at 46.228,71.374 h1 r135
  text "ENC2" at 56.642,69.088 h1 r90
  text "ENC1" at 59.182,68.834 h1 r90
  text "GND" at 61.722,68.326 h1 r90
  text "5V" at 54.102,67.056 h1 r90
  text "M2" at 64.262,67.056 h1 r90
  text "M1" at 66.802,67.056 h1 r90
  text "GND" at 70.866,63.5 h1 r90
  text "24V" at 74.93,63.5 h1 r90
Mechanical 2:
  the board outline again, w0.2

## Text inside footprints (layer, text, board x,y; h text height)
ISCP: Top Overlay "1" at 74.93,86.106 h1.27 r90; Top Overlay "2" at 72.39,85.598 h1.27 r90; Top Overlay "5" at 74.93,94.742 h1.27 r90; Top Overlay "6" at 72.39,94.742 h1.27 r90
P1: Bottom Overlay "8" at 52.347,73.011 h1.27 r315; Bottom Overlay "7" at 50.641,71.304 h1.27 r315; Bottom Overlay "2" at 44.196,80.772 h1.27 r315; Bottom Overlay "1" at 42.418,78.994 h1.27 r315
P2: Bottom Overlay "1" at 47.498,101.854 h1.27 r225; Bottom Overlay "2" at 51.308,99.568 h1.27 r225; Bottom Overlay "7" at 41.84,93.377 h1.27 r225; Bottom Overlay "8" at 43.547,91.671 h1.27 r225